# Altium PCB PRG_v2.0.PcbDoc
Units mm, origin at the board's own origin, x right, y up, seen from the top; angles counter-clockwise.
Board outline 80 x 30 mm, 2 copper layers (Top Layer, Bottom Layer); 57 components, 46 nets, 224 pads, 59 vias.
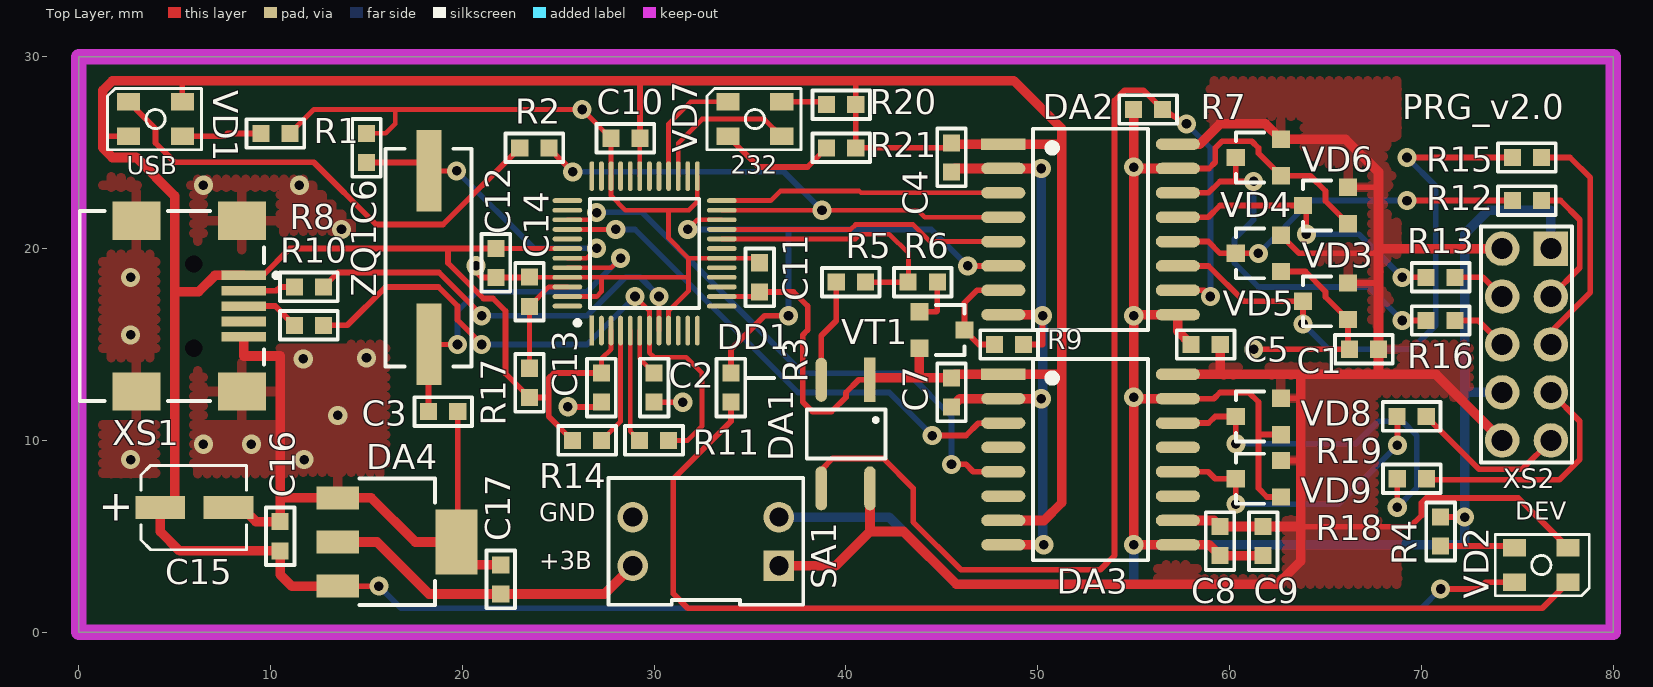
[diagram p0: Top Layer view]
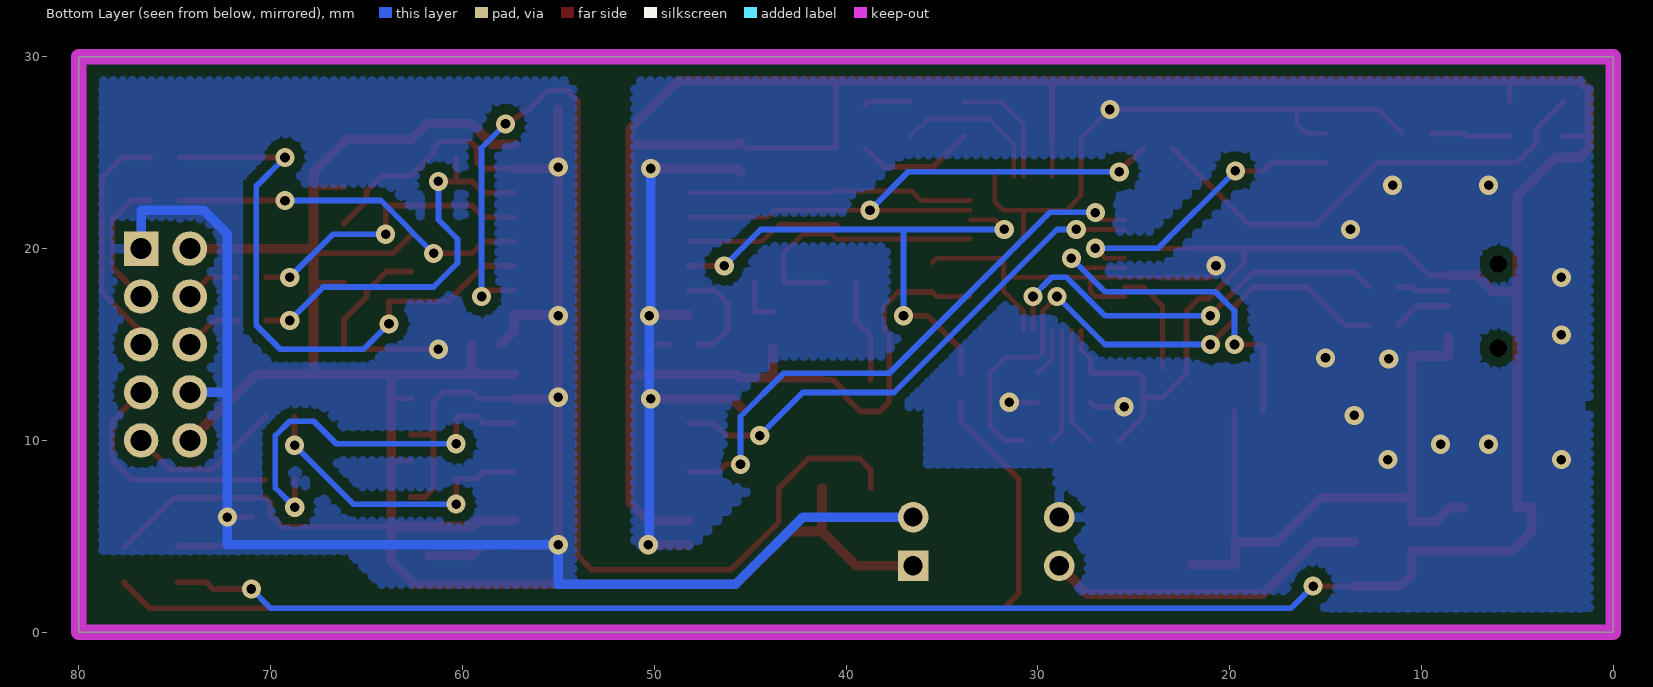
[diagram p1: Bottom Layer view, seen from below]

## Layer stack, top to bottom
Top Layer: signal copper 0.0356
Dielectric: dielectric 0.32, FR-4, Dk 4.8
Bottom Layer: signal copper 0.0356

## Board outline
0,0 0,30 80,30 80,0

## Design rules (kind name [scope] priority, off if disabled: settings)
Clearance Clearance_3 [InNamedPolygon('GND1_USB_')] p1: gap=0.5
Clearance Clearance_2 [InNamedPolygon('GND1_USB')] p2: gap=0.5
Clearance [InNamedPolygon('GND1_USB')] p3: gap=0.5
Clearance Clearance_1 [All] p4: gap=0.25
Clearance Clearance_Poor [InPolygon] p5: gap=0.5
ComponentClearance [All] p1 off: gap=0.254 collisioncheckmode=3 verticalgap=0.254 showdistances=FALSE
MinimumSolderMaskSliver [All] p1: minsoldermaskwidth=0
PolygonConnect PolygonConnect_Poor [IsVia] p1: connectstyle=Direct reliefconductorwidth=0.254 reliefentries=4 polygonreliefangle="90 Angle"
PolygonConnect [All] p2: connectstyle=Relief reliefconductorwidth=0.5 reliefentries=4 polygonreliefangle="90 Angle"
RoutingVias [All] p1: holewidth=0.7 width=1 viastyle="Through Hole" minholewidth=0.7 minwidth=1 maxholewidth=0.7 maxwidth=1
SilkscreenOverComponentPads [All] p1: minsilkscreentomaskgap=0.254
SolderMaskExpansion [All] p1: expansion=0.1
Width [All] p1: maxlimit=0.5 minlimit=0.25 preferedwidth=0.3 bottomlayer_minwidth=0.3 minimp=50.000000 maximp=50.000000 favimp=50.000000
25 further rules are at their usual default settings.

## Components (designator, comment, footprint, x,y, rotation, side; value= is the part's Value field where it differs from the comment)
C1 "Конденсатор" 0603 67,14.75 r0 top
C2 "Конденсатор" 0603 30,12.75 r90 top
C3 "Конденсатор" 0603 19,11.5 r180 top
C4 "Конденсатор" 0603 45.5,24.75 r90 top
C5 "Конденсатор" 0603 58.75,15 r0 top
C6 "Конденсатор" 0603 15,25.25 r270 top
C7 "Конденсатор" 0603 45.5,12.5 r90 top
C8 "Конденсатор" 0603 59.5,4.75 r90 top
C9 "Конденсатор" 0603 61.75,4.75 r90 top
C10 "Конденсатор" 0603 28.5,25.75 r180 top
C11 "Конденсатор" 0603 35.5,18.5 r90 top
C12 "Конденсатор" 0603 21.75,19.25 r270 top
C13 "Конденсатор" 0603 27.25,12.75 r270 top
C14 "Конденсатор" 0603 23.5,17.75 r90 top
C15 "Конденсатор электролитический" C+A 4.25,6.5 r0 top
C16 "Конденсатор" 0603 10.5,5 r270 top
C17 "Конденсатор" 0603 22,2.75 r270 top
DA1 "Оптопара" SOIC4 41.25,13.16 r270 top
DA2 "Буфер с гальванической развязкой" SOIC16 52.75,21 r0 top
DA3 "Буфер с гальванической развязкой" SOIC16 52.75,9 r0 top
DA4 "Стабилизатор напряжения" SOT223 13.5,7 r270 top
DD1 "Dual USB to Serial UART/FIFO IC" LQFP48 29.5,19.75 r90 top
R1 "Резистор" 0603 10.25,26 r180 top
R2 "Резистор" 0603 23.75,25.25 r180 top
R3 "Резистор" 0603 34,12.75 r270 top
R4 "Резистор" 0603 71,5.25 r90 top
R5 "Резистор" 0603 40.25,18.25 r180 top
R6 "Резистор" 0603 44,18.25 r180 top
R7 "Резистор" 0603 55.75,27.25 r0 top
R8 "Резистор" 0603 12,18 r0 top
R9 "Резистор" 0603 48.5,15 r0 top
R10 "Резистор" 0603 12,16 r0 top
R11 "Резистор" 0603 29.99,10 r180 top
R12 "Резистор" 0603 75.5,22.5 r0 top
R13 "Резистор" 0603 71,18.5 r0 top
R14 "Резистор" 0603 26.5,10 r0 top
R15 "Резистор" 0603 75.5,24.75 r0 top
R16 "Резистор" 0603 71,16.25 r0 top
R17 "Резистор" 0603 23.5,13 r90 top
R18 "Резистор" 0603 69.5,8 r0 top
R19 "Резистор" 0603 69.49,11.25 r0 top
R20 "Резистор" 0603 39.75,27.5 r180 top
R21 "Резистор" 0603 39.75,25.25 r180 top
SA1 "Микропереключатель" DS-02 36.5,3.46 r90 top
VD1 "Светодиод двухцветный" KAA-3528SURKCGKC 4,26.75 r180 top
VD2 "Светодиод двухцветный" KAA-3528SURKCGKC 76.25,3.5 r0 top
VD3 "Пара защитный диодов Шоттки" SOT23 61.5,19.75 r90 top
VD4 "Пара защитный диодов Шоттки" SOT23 65,22.25 r90 top
VD5 "Пара защитный диодов Шоттки" SOT23 65,17.25 r90 top
VD6 "Пара защитный диодов Шоттки" SOT23 61.5,24.75 r90 top
VD7 "Светодиод двухцветный" KAA-3528SURKCGKC 35.25,26.75 r180 top
VD8 "Пара защитный диодов Шоттки" SOT23 61.5,11.25 r90 top
VD9 "Пара защитный диодов Шоттки" SOT23 61.5,8 r90 top
VT1 "Транзистор pnp" SOT23 45,15.75 r270 top
XS1 "Разъем мини-USB" "mini USB A" 0.75,17 r180 top locked
XS2 "IDC-10MR" IDC-10MR 76.75,13.75 r180 top
ZQ1 "Кварцевый резонатор" HC49-SM 18.25,15 r90 top

## Footprints (in the part's own frame and the unit in brackets; to place one, negate y for a bottom-side part, rotate by r counter-clockwise, add the part's x,y. Pads: shape width x height; smd on the part's side, far side on the other; paste and mask are expansions set on the pad)
0603 [mm]
  rect 0.89x0.89 smd paste+0 mask+0.1: 1(-0.76,0) 2(0.76,0)
  silkscreen extent -1.5,-0.74 1.51,0.74
C+A [mm]
  rect 2.6x1.2 smd mask-25.4: 1(0,0) 2(3.55,0)
  silkscreen extent -1,-2.2 4.5,2.2
DS-02 [mm]
  rect 1.6x1.6 hole 1 paste+0 mask+0.1: 1(0,0)
  round 1.6 hole 1 paste+0 mask+0.1: 2(2.54,0) 3(0,7.62) 4(2.54,7.62)
  silkscreen extent -2.03,-1.27 4.57,8.89
HC49-SM [mm]
  rect 4.25x1.3 smd paste-8: 1(9.05,0) 2(0,0)
  silkscreen extent -1.15,-2.22 10.2,2.25
IDC-10MR [mm]
  rect 1.8x1.8 hole 1.1 paste-0.05: 1(0,-6.25)
  round 1.8 hole 1.1 paste-0.05: 2(2.54,-6.25) 3(0,-3.75) 4(2.54,-3.75) 5(0,-1.25) 6(2.54,-1.25) 7(0,1.25) 8(2.54,1.25) 9(0,3.75) 10(2.54,3.75)
  silkscreen extent -1.1,-7.4 3.64,4.9
KAA-3528SURKCGKC [mm]
  rect 1.2x0.9 smd paste+0 mask+0.1: 1(1.4,-0.9) 2(-1.4,-0.9) 3(-1.4,0.9) 4(1.4,0.9)
  silkscreen extent -2.4,-1.6 2.5,1.6
LQFP48 [mm] "48-Pin Thin Quad Flat Pack 0.5 mm Pitch, IPC High Density"
  rect 1.55x0.25 smd: 1(-4.025,2.75)
  oval 1.55x0.25 smd: 2(-4.025,2.25) 3(-4.025,1.75) 4(-4.025,1.25) 5(-4.025,0.75) 6(-4.025,0.25) 7(-4.025,-0.25) 8(-4.025,-0.75) 9(-4.025,-1.25) 10(-4.025,-1.75) 11(-4.025,-2.25) 12(-4.025,-2.75) 25(4.025,-2.75) 26(4.025,-2.25) 27(4.025,-1.75) 28(4.025,-1.25) 29(4.025,-0.75) 30(4.025,-0.25) 31(4.025,0.25) 32(4.025,0.75) 33(4.025,1.25) 34(4.025,1.75) 35(4.025,2.25) 36(4.025,2.75)
  oval 0.25x1.55 smd: 13(-2.75,-4.025) 14(-2.25,-4.025) 15(-1.75,-4.025) 16(-1.25,-4.025) 17(-0.75,-4.025) 18(-0.25,-4.025) 19(0.25,-4.025) 20(0.75,-4.025) 21(1.25,-4.025) 22(1.75,-4.025) 23(2.25,-4.025) 24(2.75,-4.025) 37(2.75,4.025) 38(2.25,4.025) 39(1.75,4.025) 40(1.25,4.025) 41(0.75,4.025) 42(0.25,4.025) 43(-0.25,4.025) 44(-0.75,4.025) 45(-1.25,4.025) 46(-1.75,4.025) 47(-2.25,4.025) 48(-2.75,4.025)
  silkscreen extent -3.75,-2.85 2.85,3.62
"mini USB A" [mm] "Connector; USB2.0, Type B, SM; 5 Position; Right Angle"
  rect 2.3x0.5 smd: 1(-7.85,-1.6) 2(-7.85,-0.8) 3(-7.85,0) 4(-7.85,0.8) 5(-7.85,1.6)
  rect 2.5x2 smd: 6(-7.75,4.45) 7(-2.25,4.45) 8(-7.75,-4.45) 9(-2.25,-4.45)
  round 0.6 hole 0.9 unplated: MH1(-5.25,2.2) MH2(-5.25,-2.2)
  silkscreen extent -9.68,-4.95 0.7,4.95
SOIC4 [mm] "16-Pin Small Outline Integrated Circuit 1.27 mm Pitch, IPC Medium Density"
  rect 2.3x0.6 smd: 1(0,0)
  oval 2.3x0.6 smd: 2(0,-2.54) 3(5.66,-2.54) 4(5.66,0)
  silkscreen extent 1.55,-3.3 4.1,0.8
SOIC16 [mm] "16-Pin Small Outline Integrated Circuit 1.27 mm Pitch, IPC Medium Density"
  rect 2.3x0.6 smd: 1(-4.55,4.445)
  oval 2.3x0.6 smd: 2(-4.55,3.175) 3(-4.55,1.905) 4(-4.55,0.635) 5(-4.55,-0.635) 6(-4.55,-1.905) 7(-4.55,-3.175) 8(-4.55,-4.445) 9(4.55,-4.445) 10(4.55,-3.175) 11(4.55,-1.905) 12(4.55,-0.635) 13(4.55,0.635) 14(4.55,1.905) 15(4.55,3.175) 16(4.55,4.445)
  silkscreen extent -3,-5.25 3,5.25
SOT23 [mm] "SOT-23; 3 Leads; Body 3.1 x 2.5 mm, inc. leads (LxW max)"
  rect 0.9x0.95 smd: 1(0,1.175) 2(-0.95,-1.175) 3(0.95,-1.175)
  silkscreen extent -1.3,-0.3 1.3,1.18
SOT223 [mm]
  rect 1.2x2.2 smd: 1(0,0) 2(2.3,0) 3(4.6,0)
  rect 3.4x2.2 smd: 1(2.3,6.2)
  silkscreen extent -1.02,1.14 5.59,5.08

## Part data
C1 C2 C3 C4 C5 C6 C7 C8 C9 C10 C11 C12 C13 C14 C16 C17: library part C
C15: library part C+
DA1: library part CPC1008N, "Оптореле"
DA2: library part ADuM1401
DA3: library part ADuM1402
DA4: library part VREG
DD1: library part FT2232D
R1 R2 R3 R4 R5 R6 R7 R8 R9 R10 R11 R12 R13 R14 R15 R16 R17 R18 R19 R20 R21: library part R
SA1: library part DS-02
VD1 VD2 VD7: library part "Светодиод RG"
VD3 VD4 VD5 VD6 VD8 VD9: library part BAV99
VT1: library part PNP
XS1: library part miniUSB
ZQ1: library part ZQ

## Via types
v1: diameter 1, hole 0.5, Top Layer to Bottom Layer, tented both sides, 59 vias

## Nets (pads, with @x,y where several pads share a name; then routed paths per layer and width w, separated by ;. In a path a pad name is that pad's centre, name@x,y a point inside that pad or via, vN(x,y) a via of type N, cw(c..) or ccw(c..) an arc to the next point about the centre after c; other vN are vias at no path point)
D+: DD1.7 R10.2 R11.1 | length 31
  Top Layer w0.25: v1(29,17.5) 29.75,16.75 DD1.7 29.75,14.58 30,14.33 31.67,14.33 32.5,13.5 32.5,10.75 31.75,10 R11.1
  Top Layer w0.3: R10.2 14,16 16,18 18.75,18 19.75,17 19.75,16.273 21,15.023 v1(21,15)
  Bottom Layer w0.3: v1(21,15) 26.5,15 v1(29,17.5)
D-: DD1.8 R8.2 | length 21.8
  Top Layer w0.25: DD1.8 v1(30.25,17.5)
  Top Layer w0.3: R8.2 13.51,18.75 18.783,18.75 21,16.533 v1(21,16.5)
  Bottom Layer w0.3: v1(21,16.5) 26.5,16.5 28.5,18.5 29.273,18.5 v1@30.25,17.523
GND1: C2.1 C3.1 C4.1 C6.1 C7.1 C10.2 C11.2 C12.2 C13.2 C14.2 C15.2 C16.1 C17.1 DA2.2 DA2.8 DA3.2 DA3.8 DA4.1 DD1.9 DD1.18 DD1.25 DD1.34 DD1.45 DD1.47 R1.1 R9.2 SA1.4 XS1.5 XS1.6 XS1.7 XS1.8 XS1.9 | length 128.7
  Top Layer w0.25: R1.1 12.26,27.25 v1(26.24,27.25) C10.2 27.75,25.74 DD1.34 27.75,22.75 28.5,22 31.808,22 32.25,22.442 DD1.25 ; C6.1 16.01,26.01 16.5,26.5 16.5,27.25 ; C14.2@23.51,18.5 DD1.45 31.786,18.5 ; DD1.47 27,17.5 27.25,17.75 27.25,18.5 ; DD1.9 30.75,16.75 31.786,17.786 31.786,19.5 ; 30.75,22 30.75,20.536 31.786,19.5 ; C11.2 35.26,19.5 DD1.18 31.786,19.5
  Top Layer w0.3: DA4.1@19.76,4.76 C3.1 ; v1(20.709,19.1) 20.709,18.791 21.01,18.49 C12.2 C14.2@23.48,18.49 ; v1@25.51,11.74 27,11.74 C13.2 ; C2.1 v1(31.49,11.99) ; R9.2 50.25,15 v1(50.25,16.5)
  Top Layer w0.5: C15.2 8.5,6.5 9.24,5.76 C16.1 10.5,9 10.5,10.75 10.5,12.5 10.5,14.4 8.6,14.4 XS1.5 ; 10.5,7 13.5,7 15.25,7 17.55,4.7 19.7,4.7 19.7,3.51 C17.1 ; C7.1 45.935,12.175 DA3.2 v1(50.175,12.175) ; C4.1 45.685,24.175 DA2.2 v1(50.175,24.175) ; DA3.8 v1(50.305,4.555) ; DA2.8 50.195,16.555 v1(50.25,16.5)
  Bottom Layer w0.5: v1@50.175,16.575 v1(50.175,24.175) ; v1@50.25,4.61 v1(50.25,16.5)
  other v1: 2.7,9 11.75,9 6.5,9.8 9,9.8 13.5,11.3 25.5,11.75 11.7,14.25 15,14.3 2.7,15.5 2.7,18.5 13.7,21 6.5,23.3 11.5,23.3
GND2: C1.1 C5.1 C8.1 C9.1 DA2.9 DA2.15 DA3.9 DA3.15 R4.2 R7.1 SA1.2 VD3.2 VD4.2 VD5.2 VD6.2 VD8.2 VD9.2 XS2.1 XS2.8 | length 138
  Top Layer w0.3: DA3.15 59.175,12.175 59.5,12.5 61,12.5 61.5,12 61.5,7.5 61.95,7.05 VD9.2 ; DA2.15 58.925,24.175 59.25,24.5 59.25,25.25 59.6,25.6 61.15,25.6 61.5,25.25 61.5,24.975 VD6.2 64.2,23.8 65,23 65,22.475 VD4.2 ; v1(61.25,14.75) C1.1 66.175,14.815 VD5.2 65,17.475 65,17.75 63.95,18.8 VD3.2 ; 61.55,10.3 VD8.2 VD8.2@62.534,10.3 ; R4.2 v1@72.25,6.01
  Top Layer w0.5: v1@55,12.175 DA3.15 ; v1@55,16.555 DA2.9 57.3,15.69 C5.1 ; v1@55,24.175 DA2.15 ; R7.1@55,27.25 v1(55,24.25) v1(55,16.5) v1(55,12.25) v1(55,4.555) DA3.9 ; DA3.9@58.445,4.555 58.945,4.555 59.51,3.99 C9.1
  Bottom Layer w0.5: SA1.2 42.25,6 45.75,2.5 55,2.5 v1(55,4.555) 72.25,4.555 72.25,20.75 73.5,22 76.75,22 XS2.1 ; 72.25,12.5 XS2.8
  other v1: 72.25,6
MISO1: DA2.6 DD1.22 R3.1 | length 28.7
  Top Layer w0.25: v1(31.75,21) 32.25,21.5 DD1.22
  Top Layer w0.3: R3.1 34,14.75 35.75,16.5 v1(37,16.5) ; v1(46.345,19.095) DA2.6
  Bottom Layer w0.3: v1(31.75,21) 44.44,21 v1(46.345,19.095) ; v1(37,16.5) 37,21
MISO2: DA2.11 R15.1 VD5.1 | length 31.3
  Top Layer w0.3: DA2.11 58.905,19.095 60.75,17.25 VD5.1 v1(63.825,16.075) ; v1(69.25,24.75) R15.1
  Bottom Layer w0.3: v1(63.825,16.075) 65.15,14.75 69.5,14.75 70.75,16 70.75,23.25 v1(69.25,24.75)
MOSI1: DA2.4 DD1.23 R2.1 | length 30.4
  Top Layer w0.25: DD1.23 v1(38.75,22) 43.75,22 44.115,21.635 DA2.4
  Top Layer w0.3: R2.1@24.505,25.245 v1(25.75,24)
  Bottom Layer w0.3: v1(25.75,24) 36.75,24 v1(38.75,22)
MOSI2: DA2.13 R13.1 VD4.1 | length 15.8
  Top Layer w0.3: DA2.13 58.885,21.635 59.5,22.25 VD4.1 64,22.075 v1(64,20.75) v1@64,20.5 ; v1(69,18.5) R13.1
  Bottom Layer w0.3: v1(64,20.75) 66.75,20.75 v1(69,18.5)
NetC2_2: C2.2 DD1.6 | length 2.5
  Top Layer w0.25: DD1.6 29.25,14.26 C2.2
NetC3_2: C3.2 DD1.44 ZQ1.2 | length 19.4
  Top Layer w0.25: ZQ1.2 19.75,15 19.748,14.998 v1(19.746,14.998) ; DD1.44 27.75,19 v1(28.25,19.5)
  Top Layer w0.3: C3.2 ZQ1.2@18.24,14.99
  Bottom Layer w0.3: v1(19.746,14.998) 19.748,14.998 19.75,15 19.75,16.75 20.75,17.75 26.5,17.75 v1(28.25,19.5)
NetC6_2: C6.2 DD1.43 ZQ1.1 | length 15.6
  Top Layer w0.25: ZQ1.1 v1(19.7,24.05) ; DD1.43 26.482,19.5 v1(27,20.018)
  Top Layer w0.3: C6.2 17.81,24.49 ZQ1.1
  Bottom Layer w0.3: v1(19.7,24.05) 23.732,20.018 v1(27,20.018)
NetC14_1: C14.1 DD1.46 R17.2 | length 5.6
  Top Layer w0.25: R17.2 C14.1 24.51,18 DD1.46
NetC17_2: C17.2 DA4.2 SA1.3 | length 17.1
  Top Layer w0.5: DA4.2 15.55,4.7 18.26,1.99 C17.2 27.41,1.99 SA1.3
NetDA1_2: DA1.2 R5.2 | length 5.4
  Top Layer w0.3: DA1.2 38.71,15.46 39.49,16.24 R5.2
NetDA1_3: DA1.3 DA2.10 R7.2 | length 59.9
  Top Layer w0.3: DA1.3 38.71,8.46 39.3,9.05 41.95,9.05 43.5,7.5 43.5,5.75 46,3.25 53.25,3.25 54,4 54,27.716 54.534,28.25 55.51,28.25 R7.2 v1(57.75,26.5) ; DA2.10 58.675,17.825 v1(59,17.5)
  Bottom Layer w0.3: v1(57.75,26.5) 59,25.25 v1(59,17.5)
NetDA2_7: DA2.7 R9.1 VT1.1 | length 5.6
  Top Layer w0.3: R9.1 46.925,15 VT1.1 46.175,17.175 46.825,17.825 DA2.7
NetDD1_4: DD1.4 R14.2 | length 6.1
  Top Layer w0.25: R14.2 28.25,10.99 DD1.4
NetDD1_5: DD1.5 R11.2 | length 5.9
  Top Layer w0.25: DD1.5 28.75,10.48 R11.2
NetR1_2: R1.2 VD1.3 | length 4.2
  Top Layer w0.3: VD1.3 7.6,25.85 7.75,26 R1.2
NetR2_2: R2.2 VD1.1 | length 25.1
  Top Layer w0.3: VD1.1 4,26.25 4,25.5 5,24.5 12.25,24.5 15.5,21.25 18.99,21.25 R2.2
NetR3_2: R3.2 VD2.1 | length 58.8
  Top Layer w0.3: R3.2 34,11 31,8 31,2 31.75,1.25 76.3,1.25 VD2.1 VD2.1@77.6,2.6
NetR4_1: R4.1 VD2.3 | length 3.8
  Top Layer w0.3: R4.1 VD2.3@74.85,4.49
NetR6_1: R6.1 VT1.2 | length 2.4
  Top Layer w0.3: VT1.2 44.7,16.7 44.76,16.76 R6.1
NetR8_1: R8.1 XS1.2 | length 2.7
  Top Layer w0.3: XS1.2 10.3,17.8 10.5,18 R8.1
NetR10_1: R10.1 XS1.3 | length 3.1
  Top Layer w0.3: XS1.3 10.24,17 R10.1
NetR12_2: R12.2 XS2.3 | length 7
  Top Layer w0.3: R12.2 77.25,22.5 78.25,21.5 78.25,19 XS2.3
NetR13_2: R13.2 XS2.4 | length 2.9
  Top Layer w0.3: R13.2 73.21,18.5 XS2.4
NetR15_2: R15.2 XS2.5 | length 12.5
  Top Layer w0.3: R15.2 77.75,24.75 78.8,23.7 78.8,17.712 76.75,15.662 XS2.5
NetR16_2: R16.2 XS2.6 | length 3
  Top Layer w0.3: R16.2 72.96,16.25 XS2.6
NetR18_2: R18.2 XS2.7 | length 12.5
  Top Layer w0.3: R18.2@70.31,7.95 77.2,7.95 78.25,9 78.25,11 XS2.7
NetR19_2: R19.2 XS2.9 | length 8.3
  Top Layer w0.3: R19.2 73,8.5 75.25,8.5 XS2.9
NetR20_2: R20.2 VD7.2 | length 2.4
  Top Layer w0.3: VD7.2 38.84,27.65 R20.2
NetR21_2: R21.2 VD7.4 | length 6.2
  Top Layer w0.3: VD7.4 35.45,24.25 37.99,24.25 R21.2
R\S\T\1: DA2.5 DD1.21 | length 15.1
  Top Layer w0.25: DD1.21 40.25,21 40.5,21.25 43.5,21.25 44.385,20.365 DA2.5
R\X\L\E\D\: DD1.28 VD7.1 | length 6.3
  Top Layer w0.25: DD1.28 30.75,26.5 31.9,27.65 VD7.1
RST2: DA2.12 R12.1 VD3.1 | length 18.8
  Top Layer w0.3: DA2.12 58.885,20.365 59.5,19.75 VD3.1 v1(61.5,19.75) ; v1(69.25,22.5) R12.1
  Bottom Layer w0.3: v1(61.5,19.75) 64.25,22.5 v1(69.25,22.5)
RXD1: DA3.5 DD1.39 | length 30
  Top Layer w0.25: DD1.39 26.625,21.5 v1(27,21.875)
  Top Layer w0.3: v1(45.5,8.75) 46.25,8.75 46.635,8.365 DA3.5
  Bottom Layer w0.3: v1(27,21.875) 27.025,21.9 29.35,21.9 37.75,13.5 43.25,13.5 45.5,11.25 v1(45.5,8.75)
RXD2: DA3.12 R19.1 VD9.1 | length 15.7
  Top Layer w0.3: DA3.12 58.885,8.365 59.25,8 VD9.1 v1(60.325,6.675) ; v1(68.75,9.75) R19.1@68.75,11.23
  Bottom Layer w0.3: v1(60.325,6.675) 65.675,6.675 v1(68.75,9.75)
S\P\I\E\N\: DD1.20 R5.1 R6.2 | length 14
  Top Layer w0.25: DD1.20 40.5,20.5 40.75,20.75 42.26,20.75 43.26,19.75 R6.2@43.26,18.27
  Top Layer w0.3: R5.1 R6.2
SCK1: DA2.3 DD1.24 | length 14.9
  Top Layer w0.25: DD1.24 36.081,22.5 36.581,23 40.694,23 40.789,22.905 DA2.3
SCK2: DA2.14 R16.1 VD6.1 | length 21.3
  Top Layer w0.3: DA2.14 58.905,22.905 59.5,23.5 v1(61.25,23.5) ; 60.325,23.575 VD6.1 ; v1(69,16.25) R16.1
  Bottom Layer w0.3: v1(61.25,23.5) 61.25,21.5 60.25,20.5 60.25,19.25 61.5,18 67.25,18 v1(69,16.25)
T\X\L\E\D\: DD1.27 VD7.3 | length 8
  Top Layer w0.25: DD1.27 31.25,25.5 32.5,26.75 35.75,26.75 VD7.3
TXD1: DA3.3 DD1.40 | length 27.4
  Top Layer w0.25: DD1.40 v1(28,21)
  Top Layer w0.3: v1(44.5,10.25) 46.25,10.25 46.895,10.895 48.19,10.895 DA3.3
  Bottom Layer w0.3: v1(28,21) 29,21 37.5,12.5 42.25,12.5 v1(44.5,10.25)
TXD2: DA3.14 R18.1 VD8.1 | length 20.5
  Top Layer w0.3: DA3.14 58.905,10.905 59.25,11.25 VD8.1 v1(60.325,9.825) ; v1(68.74,6.51) R18.1
  Bottom Layer w0.3: v1(60.325,9.825) 66.575,9.825 67.75,11 69,11 69.75,10.25 69.75,7.52 v1(68.74,6.51)
VCC1: C4.2 C7.2 C10.1 C11.1 C12.1 C13.1 C15.1 C16.2 DA1.1 DA2.1 DA3.1 DA3.7 DA4.3 DD1.3 DD1.14 DD1.31 DD1.42 R14.1 R17.1 R20.1 R21.1 VD1.2 VD1.4 VD2.2 VT1.3 XS1.1 | length 262.5
  Top Layer w0.25: C12.1@21.76,20 DD1.42 ; C13.1 27.25,14.25 27.75,14.75 DD1.3 ; DD1.31 29.25,25.74 C10.1 ; DD1.14 35.26,17.5 C11.1
  Top Layer w0.3: 1.4,25.85 VD1.4 ; VD1.2 5.4,28.65 ; XS1.1 9.6,18.6 11,20 19.25,20 ; DA4.3 v1(15.65,2.4) ; C12.1@21.75,20 19.25,20 ; 24.49,12.24 R17.1 22.25,13.49 22.25,16.75 21.6,17.4 21.1,17.4 19.25,19.25 19.25,20 ; R14.1 24.5,11.24 24.5,13.24 24.77,13.51 C13.1 ; C10.1 29.26,28.75 ; C11.1 37.26,17.74 38,17 38,15.75 37.75,15.5 37.75,12 38.25,11.5 39.25,11.5 40,12.25 40,12.5 40.66,13.16 DA1.1 ; 40.51,28.75 R20.1 R21.1 45.24,25.25 C4.2 ; v1(71,2.25) 73,2.25 73.35,2.6 VD2.2
  Top Layer w0.5: XS1.1 7.1,18.6 6.25,17.75 5,17.75 ; DA4.3 11.1,2.4 10.5,3 C16.2 5.26,4.24 4.25,5.25 C15.1 5,6.5 5,17.75 ; DA1.1@41.35,13.26 C7.2 45.685,13.445 DA3.1 51.195,13.445 ; 43.825,13.335 VT1.3 ; C4.2 45.565,25.445 DA2.1 51.25,25.445 ; DA3.7 50.325,5.825 51.25,6.75 51.25,26.25 48.75,28.75 1.75,28.75 1.25,28.25 1.25,25.25 1.75,24.75 3,24.75 5,22.75 5,17.75
  Bottom Layer w0.3: v1(15.65,2.4) 16.8,1.25 70,1.25 v1(71,2.25)
VCC2: C1.2 C5.2 C8.2 C9.2 DA1.4 DA2.16 DA3.10 DA3.16 SA1.1 VD2.4 VD3.3 VD4.3 VD5.3 VD6.3 VD8.3 VD9.3 XS2.2 XS2.10 | length 123.6
  Top Layer w0.3: VD9.3 63.7,8.95 ; VD8.3 63.65,12.2 ; VD3.3 63.625,19.75 67.76,19.75 ; 63.7,5.5 69.41,5.5 70,6.09 70,6.75 70.25,7 75.05,7 VD2.4 ; VD5.3 67.71,18.2 ; VD4.3 67.71,23.2
  Top Layer w0.5: SA1.1 39.46,3.46 41.25,5.25 ; DA1.4 41.25,5.25 ; DA3.10 59.185,5.825 C8.2 63.7,5.51 ; DA3.16 70.765,13.445 XS2.10 ; DA2.16 58.445,25.445 59.5,26.5 61.875,26.5 VD6.3 66.05,25.7 67.76,23.99 C1.2 ; 59.51,13.455 C5.2 ; 63.7,13.445 63.7,5.5 63.7,3.7 62.5,2.5 45.75,2.5 43,5.25 41.25,5.25 ; 67.76,13.445 C1.2 ; C1.2@67.76,14.673 C1.2 ; 67.76,20 XS2.2
pads on no net: DA3.4 DA3.6 DA3.11 DA3.13 DD1.1 DD1.2 DD1.10 DD1.11 DD1.12 DD1.13 DD1.15 DD1.16 DD1.17 DD1.19 DD1.26 DD1.29 DD1.30 DD1.32 DD1.33 DD1.35 DD1.36 DD1.37 DD1.38 DD1.41 DD1.48 XS1.4 XS1.MH1 XS1.MH2

## Polygon pours and split planes (outlines as drawn)
GND2 on Bottom Layer "GND2" (hatched 90Degree grid 0.5 track 0.5, remove dead copper, pour order 1004): 78.75,4.25 78.75,28.75 54.25,28.75 54.25,2.5 64.25,2.5 66,4.25
GND1 on Bottom Layer "GND1" (hatched 90Degree grid 0.5 track 0.5, remove dead copper, pour order 1002): 1.25,1.25 1.25,28.75 51,28.75 51,4.5 48,4.5 45,7.5 45,11.75 35.75,11.75 35.75,8.75 29,8.75 29,1.25
VCC2 on Top Layer "VCC2" (hatched 90Degree grid 0.5 track 0.5, remove dead copper, pour order 1003): 68.76,2.5 68.75,12.25 72.5,12.25 72.5,15 68.75,15 68.75,28.75 59,28.75 59,25.25 64.25,25.25 64.25,14 56.25,14 56.25,2.5
GND1 on Top Layer "GND1_USB" (hatched 90Degree grid 0.5 track 0.5, remove dead copper, pour order 1001): 1.25,24 1.25,8.25 4.25,8.25 4.25,23
GND1 on Top Layer "GND1_USB_" (hatched 90Degree grid 0.5 track 0.5, remove dead copper, pour order 1000): 5.75,23.75 5.75,8.25 16,8.25 16,15 10.5,15 10.5,19 16,19 16,23.75

## Keep-outs
Keep-Out Layer:
  the board outline again, w0.8

## Silkscreen, mask and mechanical layers (free items; w line width, h text height)
Top Overlay:
  lines w0.2: 34.745,13.25 36.25,13.25
  text "PRG_v2.0" at 69,26.75 h1.3
  text "232" at 34,23.6 h1.6
  text "USB" at 2.5,23.55 h1.6
  text "DEV" at 74.9,5.55 h1.6
  text "GND" at 24,5.46 h1.6
  text "+3B" at 24,2.96 h1.6

## Text inside footprints (layer, text, board x,y; h text height)
C15: Top Overlay "+" at 1.05,5.8 h1.59